# Altium PCB AMSTOMQTT.PcbDoc
Units mil, origin at the board's own origin, x right, y up, seen from the top; angles counter-clockwise.
Board outline 2338.58 x 2141.73 mil, 2 copper layers (Top Layer, Bottom Layer); 25 components, 17 nets, 100 pads, 1 vias.
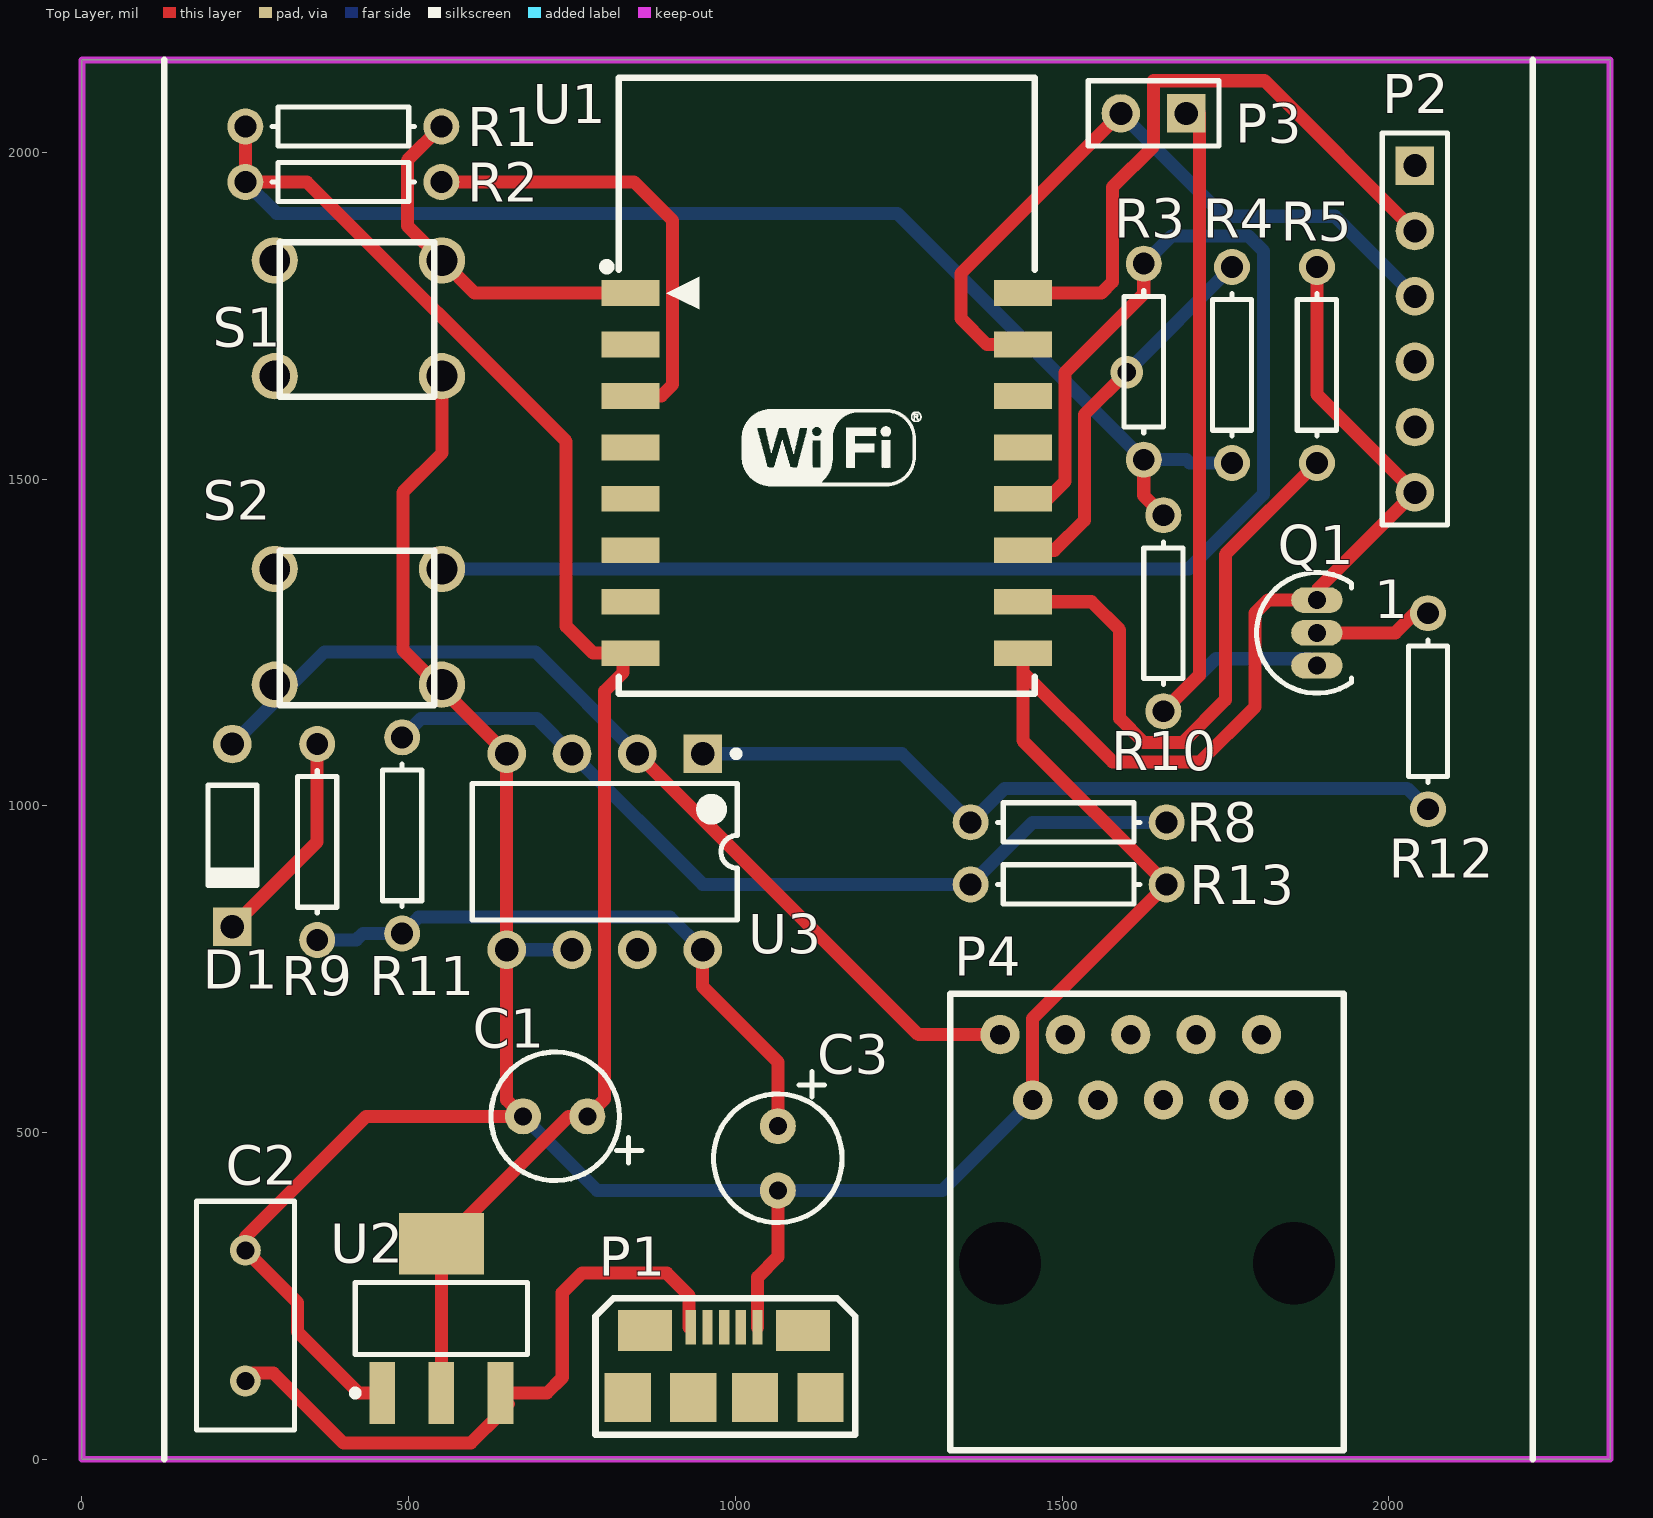
[diagram p0: Top Layer view]
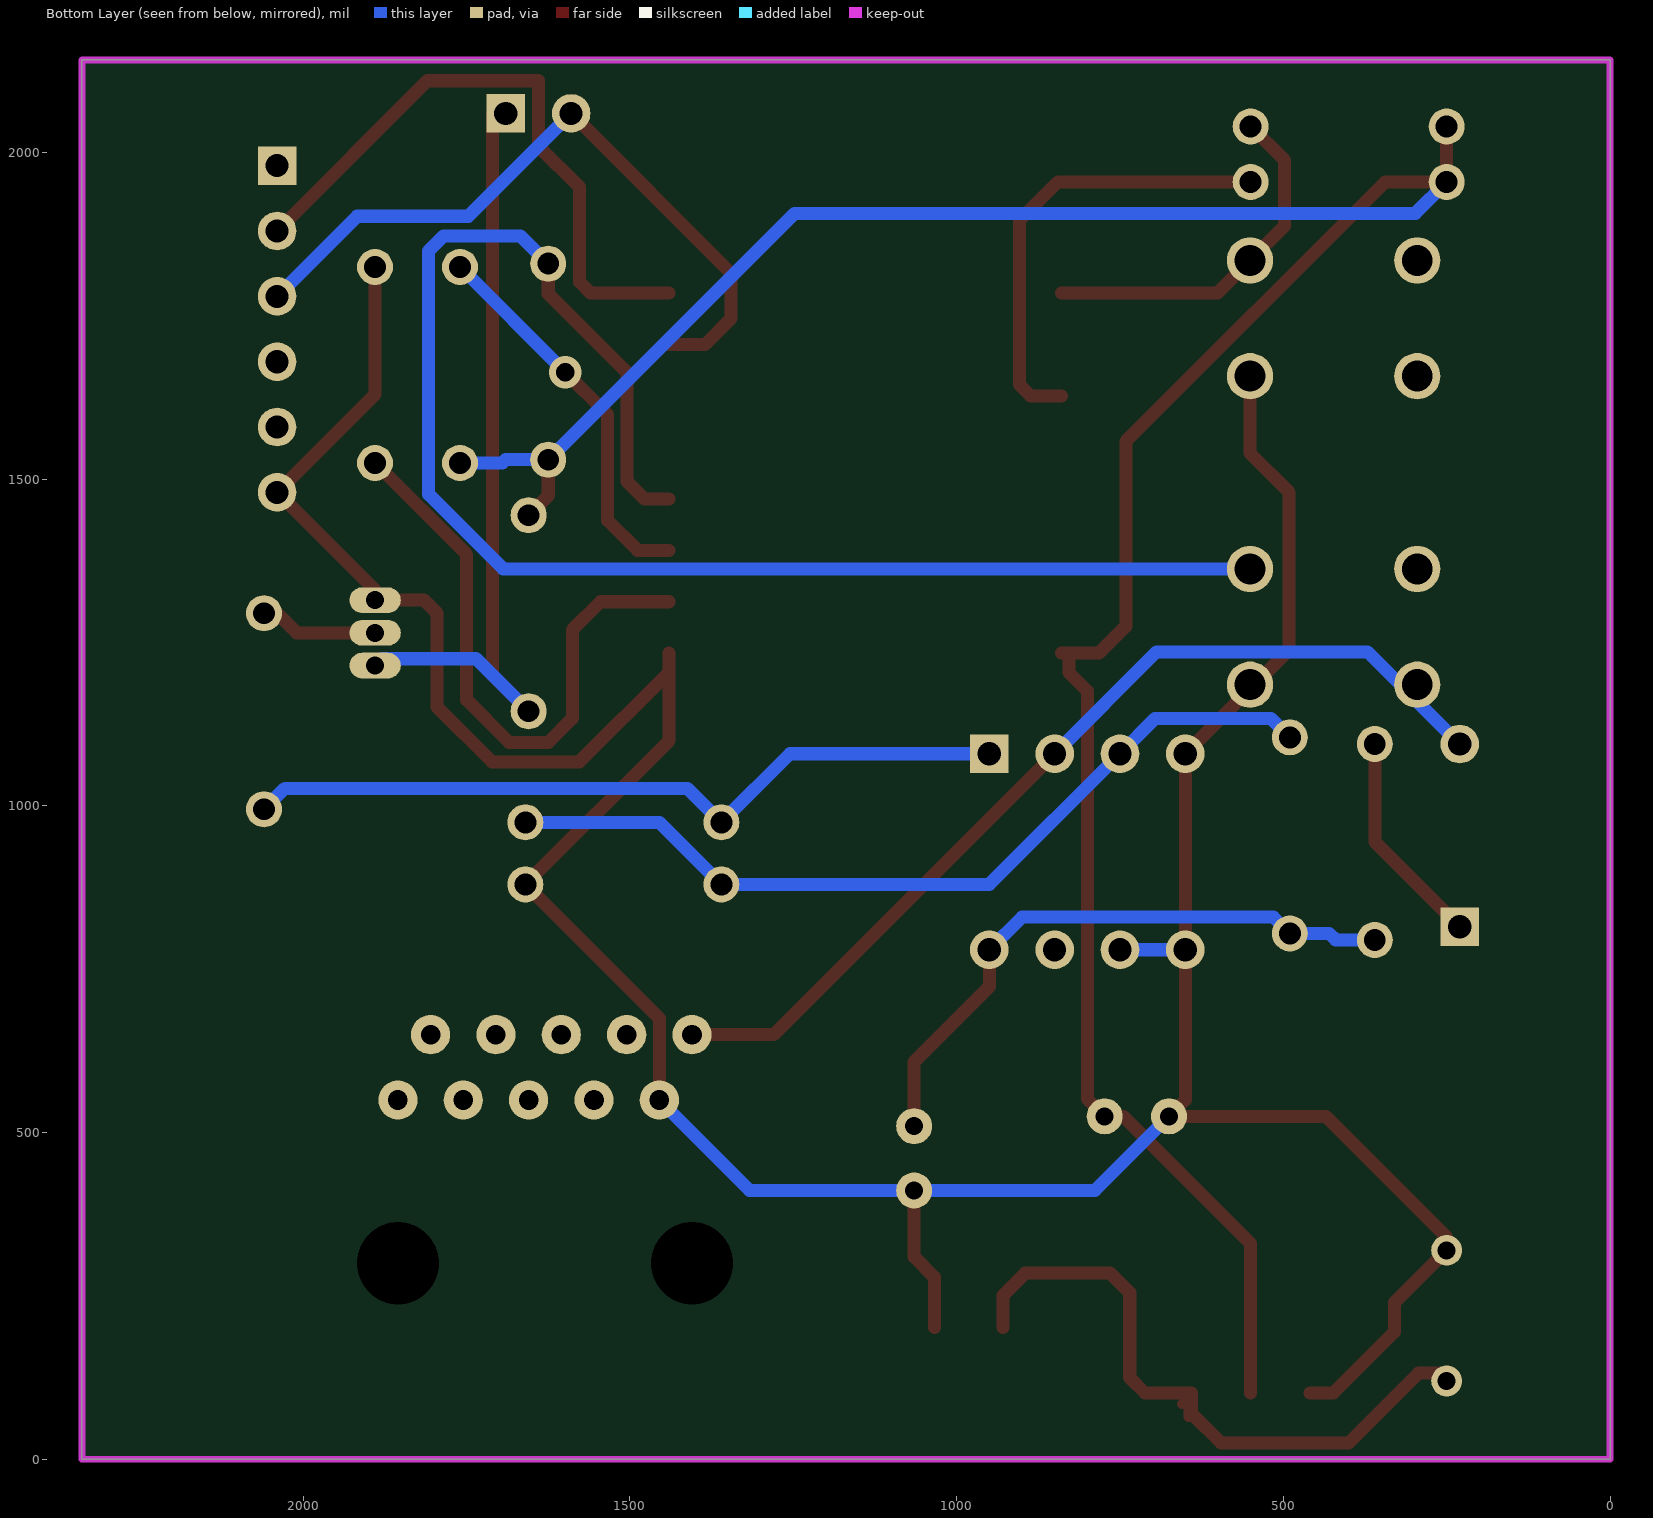
[diagram p1: Bottom Layer view, seen from below]

## Layer stack, top to bottom
Top Solder: solder mask 0.4, Solder Resist, Dk 3.5
Top Layer: signal copper 1.4
Dielectric 1: dielectric 12.6, FR-4, Dk 4.8
Bottom Layer: signal copper 1.4
Bottom Solder: solder mask 0.4, Solder Resist, Dk 3.5

## Board outline
0,0 2338.58,0 2338.58,2141.73 0,2141.73

## Design rules (kind name [scope] priority, off if disabled: settings)
Clearance [All] p1: gap=10
PolygonConnect [All] p1: connectstyle=Relief reliefconductorwidth=10 reliefentries=4 polygonreliefangle="90 Angle" airgapwidth=10
RoutingVias [All] p1: holewidth=28 width=50 viastyle="Through Hole" minholewidth=28 minwidth=50 maxholewidth=28 maxwidth=50
ShortCircuit [All] p1: allowed=TRUE
SolderMaskExpansion [All] p1: expansion=4
Width [All] p1: maxlimit=30 minlimit=10 preferedwidth=20 minimp=50.000000 maximp=50.000000 favimp=50.000000
29 further rules are at their usual default settings.

## Components (designator, comment, footprint, x,y, rotation, side; value= is the part's Value field where it differs from the comment)
C1 "Cap Pol2" CAP(10uF/25V) 773.43,525 r180 top
C2 "Cap" RAD-0.2 250,220 r270 top
C3 "Cap Pol2" CAP(10uF/25V) 1065,510 r270 top
D1 "1N4148" DO-35 230,955 r270 top
P1 "MicroUSB Connector" MicroUSB 982.76,96.97 r0 top
P2 "ProgramHeader" HDR1X6 2040,1980 r270 top
P3 "JUMPER" HDR1X2 1690,2060 r180 top
P4 "RJ45" RJ45 1405,300 r0 top
Q1 "BC337" TO-92 1890,1265 r0 top
R1 "Res3" AXIAL-0.3 400,2040 r0 top
R2 "Res3" AXIAL-0.3 400,1955 r0 top
R3 "Res3" AXIAL-0.3 1625,1680 r270 top
R4 "Res3" AXIAL-0.3 1760,1675 r270 top
R5 "Res3" AXIAL-0.3 1890,1675 r90 top
R8 "Res3" AXIAL-0.3 1510,975 r0 top
R9 "Res3" AXIAL-0.3 360,945 r90 top
R10 "Res3" AXIAL-0.3 1655,1295 r90 top
R11 "Res3" AXIAL-0.3 490,955 r270 top
R12 "Res3" AXIAL-0.3 2060,1145 r270 top
R13 "Res3" AXIAL-0.3 1510,880 r180 top
S1 "SW-PB" PUSHBUTTON 550.91,1835 r180 top
S2 "SW-PB" PUSHBUTTON 550.91,1362.83 r180 top
U1 "ESP8266 ESP_12" "ESP8266 ESP_12" 1139.8,1509.41 r0 top
U2 "LM1117MPX-3.3" MP04A_N 550,215.83 r90 top
U3 "LM358AN" N08E 800,930 r270 top

## Footprints (in the part's own frame and the unit in brackets; to place one, negate y for a bottom-side part, rotate by r counter-clockwise, add the part's x,y. Pads: shape width x height; smd on the part's side, far side on the other; paste and mask are expansions set on the pad)
AXIAL-0.3 [mm] "Axial Device, Thru-Hole; 2 Leads; 0.3 in Pin Spacing"
  round 1.4 hole 0.85: 1(-3.81,0) 2(3.81,0)
  silkscreen extent -2.77,-0.76 2.77,0.76
CAP(10uF/25V) [mm]
  round 1.4 hole 0.7: 1(0,0) 2(2.5,0)
  silkscreen extent -2.13,-2.5 3.75,2.5, body extent -1.22,-2.55 3.78,2.45, height 11
DO-35 [mm] "Diode, Axial; Body 3.8 x 1.9 mm (LxDia. max), Lead Dia. 0.53 mm (max)"
  round 1.5 hole 0.9: 1(-3.55,0)
  rect 1.5x1.5 hole 0.9: 2(3.55,0)
  silkscreen extent -1.95,-0.95 2.05,0.95
"ESP8266 ESP_12" [mm] "ESP8266 ESP-12"
  rect 2.25x1 smd: 1(-7.625,7) 2(-7.625,5) 3(-7.625,3) 4(-7.625,1) 5(-7.625,-1) 6(-7.625,-3) 7(-7.625,-5) 8(-7.625,-7) 9(7.625,-7) 10(7.625,-5) 11(7.625,-3) 12(7.625,-1) 13(7.625,1) 14(7.625,3) 15(7.625,5) 16(7.625,7)
  silkscreen extent -8.7,-8.57 8.08,15.37, body extent -7.86,-8.52 8.16,15.51, height 3.82
HDR1X2 [mm] "Connector; Header; 2 Position"
  rect 1.5x1.5 hole 0.9: 1(0,0)
  round 1.5 hole 0.9: 2(2.54,0)
  silkscreen extent -1.27,-1.27 3.81,1.27
HDR1X6 [mm] "Connector; Header; 6 Position"
  rect 1.5x1.5 hole 0.9: 1(0,0)
  round 1.5 hole 0.9: 2(2.54,0) 3(5.08,0) 4(7.62,0) 5(10.16,0) 6(12.7,0)
  silkscreen extent -1.27,-1.27 13.97,1.27
MicroUSB [mm] "MicroUSB B Connector"
  rect 1.8x1.9 smd: 0(-3.75,-0.05) 0(-1.2,-0.05) 0(1.2,-0.05) 0(3.75,-0.05)
  rect 2.1x1.6 smd: 0(-3.075,2.55) 0(3.075,2.55)
  rect 0.4x1.35 smd: 1(-1.3,2.675) 2(-0.65,2.675) 3(0,2.675) 4(0.65,2.675) 5(1.3,2.675)
  silkscreen extent -5,-1.5 5.1,3.8, body extent -3.99,-2.18 3.99,3.25, height 2.67
MP04A_N [mm] "SOT223, 4-Leads, Body 6.5x3.5mm, Pitch 2.3mm, Lead Span 7mm, IPC Medium Density"
  rect 2.4x1 smd: 1(-2.9,2.3) 2(-2.9,0) 3(-2.9,-2.3)
  rect 2.4x3.3 smd: 4(2.9,0)
  silkscreen extent -3.02,-3.35 1.4,3.47, body extent -1.86,-3.35 1.86,3.35, height 1.8
N08E [mm] "DIP, 8-Pin, Row Spacing 7.62 mm, Pitch 2.54 mm"
  rect 1.5x1.5 hole 0.9: 1(-3.81,3.81)
  round 1.5 hole 0.9: 2(-3.81,1.27) 3(-3.81,-1.27) 4(-3.81,-3.81) 5(3.81,-3.81) 6(3.81,-1.27) 7(3.81,1.27) 8(3.81,3.81)
  silkscreen extent -3.93,-5.15 2.65,5.24, body extent -3.6,-5.15 3.6,5.15, height 5.34
PUSHBUTTON [mm]
  round 1.8 hole 1.2: 1(0,0) 2(0,4.5) 3(6.5,0) 4(6.5,4.5)
  silkscreen extent 0.3,-0.7 6.3,5.3
RAD-0.2 [mm] "Radial Cap, Thru-Hole; 2 Leads; 0.2 in Pin Spacing"
  round 1.2 hole 0.7: 1(-2.54,0) 2(2.54,0)
  silkscreen extent -4.44,-1.91 4.44,1.91
RJ45 [mil] "RJ45 Jack 10Pin"
  round 0 hole 125.98: 0(0,0) 0(450,0)
  round 60 hole 29.92: 1(0,350) 2(50,250) 3(100,350) 4(150,250) 5(200,350) 6(250,250) 7(300,350) 8(350,250) 9(400,350) 10(450,250)
  silkscreen extent -76,-286 526,413
TO-92 [mm] "TO, Flat Index; 3 In-Line, Axial Leads; Body Dia. 4.6mm; Leads 0.41 x 0.39 mm (max)"
  oval 2x1 hole 0.7: 1(0,1.27) 2(0,0) 3(0,-1.27)
  silkscreen extent -2.34,-2.34 1.35,2.34

## Part data
C1 C3: "Polarized Capacitor (Axial)"
C2: "Capacitor"
D1: library part "Diode 1N4148", "High Conductance Fast Diode"
P1: library part "Header 5", "Header, 5-Pin"
P2: library part "Header 6", "Header, 6-Pin"
P3: library part "Header 2", "Header, 2-Pin"
P4: library part "Header 10", "Header, 10-Pin"
Q1: library part 2N3904, "NPN General Purpose Amplifier"
R1 R2 R3 R4 R5 R8 R9 R10 R11 R12 R13: "Resistor"
S1 S2: "Switch"
U1: "ESP8266 ESP-12"
U2: "800mA Low-Dropout Linear Regulator, 4-pin SOT-223"
U3: "Low Power Dual Operational Amplifier, 8-pin MDIP"

## Via types
v1: diameter 50, hole 28, Top Layer to Bottom Layer, 1 vias

## Nets (pads, with @x,y where several pads share a name; then routed paths per layer and width w, separated by ;. In a path a pad name is that pad's centre, name@x,y a point inside that pad or via, vN(x,y) a via of type N, cw(c..) or ccw(c..) an arc to the next point about the centre after c; other vN are vias at no path point)
+3V3: C1.1 R1.1 R2.1 R3.2 R4.2 R10.2 U1.8 U2.2 U2.4 | length 4188.6
  Top Layer w20: R1.1 R2.1 344,1955 741,1558 741,1275 782.18,1233.82 U1.8@828,1233.82 ; U2.2 U2.4 745,525 C1.1 800,551.57 800,1176 828,1204 U1.8@828,1233.82 ; U1.8 U1.8@828,1233.82 ; R3.2 1625,1475 R10.2
  Bottom Layer w20: R2.1 298,1907 1248,1907 R3.2 1690,1530 1695,1525 R4.2
GND: C1.2 C2.1 C3.2 P1.5 P2.6 P4.2 Q1.1 R5.2 R13.1 S1.2 S2.2 U1.9 U2.1 U3.4 U3.5 U3.6 | length 5476
  Top Layer w20: U2.1 423.35,101.65 330,195 330,240 C2.1 250,340 435,525 C1.2 650,550 U3.5 U3.4 491,1239 491,1480.09 550.91,1540 S1.2 ; P1.5 1033.94,278.94 1065,310 C3.2 ; U1.9 1440,1204.88 ; P4.2 1455,675 R13.1 1440,1100 1440,1204.88 ; R5.2 1890,1630 P2.6 1890,1330 Q1.1 1815,1315 1795,1295 1795,1151.3 1711.14,1067.44 1577.44,1067.44 1440,1204.88
  Bottom Layer w20: U3.5 U3.6 ; C1.2 788.43,411.57 1316.57,411.57 P4.2
GPIO0: R3.1 S2.1 U1.12 | length 2345.9
  Top Layer w20: U1.12 1478,1470.04 1504.29,1496.33 1504.29,1663.29 1625,1784 R3.1
  Bottom Layer w20: S2.1 1693.83,1362.83 1808,1477 1808,1849.56 1785,1872.56 1667.56,1872.56 R3.1
NetD1_1: D1.1 P4.1 U3.2 | length 1476.2
  Top Layer w20: U3.2 1280,650 P4.1
  Bottom Layer w20: D1.1 371.24,1236 694,1236 U3.2
NetD1_2: D1.2 R9.2 | length 333.6
  Top Layer w20: D1.2 360,945.24 R9.2
NetQ1_2: Q1.2 R12.1 | length 182.4
  Top Layer w20: Q1.2 2010,1265 2040,1295 R12.1
NetR2_2: R2.2 U1.3 | length 701.1
  Top Layer w20: R2.2 845,1955 904,1896 904,1645 886.52,1627.52 U1.3
NetR4_1: R4.1 U1.11 | length 594.5
  Top Layer w20: U1.11 1488.3,1391.3 1534.29,1437.29 1534.29,1599.29 v1(1599,1664)
  Bottom Layer w20: v1(1599,1664) R4.1
NetR5_1: R5.1 U1.10 | length 926
  Top Layer w20: U1.10 1545,1312.56 1588,1269.56 1588,1134 1624.56,1097.44 1685,1097.44 1750,1162.44 1750,1385 R5.1
NetR8_1: R8.1 R12.2 U3.1 | length 1188.3
  Bottom Layer w20: U3.1 1255,1080 R8.1 1412,1027 2028,1027 R12.2
NetR8_2: R8.2 R11.1 R13.2 U3.3 | length 1326.6
  Bottom Layer w20: R11.1 519,1134 696,1134 U3.3 950,880 R13.2 1455,975 R8.2
RST: R1.2 S1.1 U1.1 | length 557.9
  Top Layer w20: R1.2 498,1988 498,1887.91 S1.1 600.91,1785 U1.1
RX: P2.3 P3.2 U1.15 | length 1092.8
  Top Layer w20: U1.15 1385,1706.26 1345,1746.26 1345,1815 P3.2
  Bottom Layer w20: P3.2 1747.44,1902.56 1917.44,1902.56 P2.3
RXTTL3V3: P3.1 Q1.3 R10.1 | length 1230.3
  Top Layer w20: R10.1 1710,1200 1710,2060 P3.1
  Bottom Layer w20: R10.1 1735.31,1225.32 1879.69,1225.32 Q1.3
TX: P2.2 U1.16 | length 973.4
  Top Layer w20: U1.16 1560,1785 1577,1802 1577,1947 1640,2010 1640,2110 1810,2110 P2.2
VCC: C2.2 P1.1 U2.3 | length 1044.6
  Top Layer w15: C2.2@235,120 C2.2@250,105 ; U2.3@640,65 640,70 U2.3@640,95 ; U2.3@645,65 U2.3@645,75 ; U2.3@650,90 U2.3@655,85
  Top Layer w20: C2.2@261.95,131.95 293.05,131.95 400,25 595,25 640,70 640.55,70.55 U2.3 711.65,101.65 735,125 735,255 765,285 895,285 929.29,250.71 P1.1@929.29,202.28
VDD: C3.1 R9.1 R11.2 U3.8 | length 942.8
  Top Layer w20: U3.8 950,723.42 1065,608.42 C3.1
  Bottom Layer w20: R9.1 420,795 430,805 R11.2 515,830 900,830 U3.8
pads on no net: P1.0 P1.2 P1.3 P1.4 P2.1 P2.4 P2.5 P4.0 P4.3 P4.4 P4.5 P4.6 P4.7 P4.8 P4.9 P4.10 S1.3 S1.4 S2.3 S2.4 U1.2 U1.4 U1.5 U1.6 U1.7 U1.13 U1.14 U3.7

## Keep-outs
Keep-Out Layer:
  the board outline again, w10

## Silkscreen, mask and mechanical layers (free items; w line width, h text height)
Top Overlay:
  lines w10: 125.98,0 125.98,2141.73 ; 2220.47,0 2220.47,2141.73

## Dimensions
0,0 to 0,2141.73 on Top Overlay
0,0 to 2338.58,0 on Top Overlay
125.98,0 to 2220.47,0 on Top Overlay

## Text inside footprints (layer, text, board x,y; h text height)
Q1: Top Overlay "1" at 1977.56,1287.05 h59.05
U1: Mechanical 13 "ANTENNA AREA" at 829.84,2095 h10; Mechanical 13 "CUTOUT POLYGON" at 829.84,2075 h10